# Altium PCB OLED.PcbDoc
Units mm, origin at the board's own origin, x right, y up, seen from the top; angles counter-clockwise.
Board outline 24.94 x 23.94 mm, 2 copper layers (Top Layer, Bottom Layer); 6 components, 5 nets, 14 pads, 24 vias.
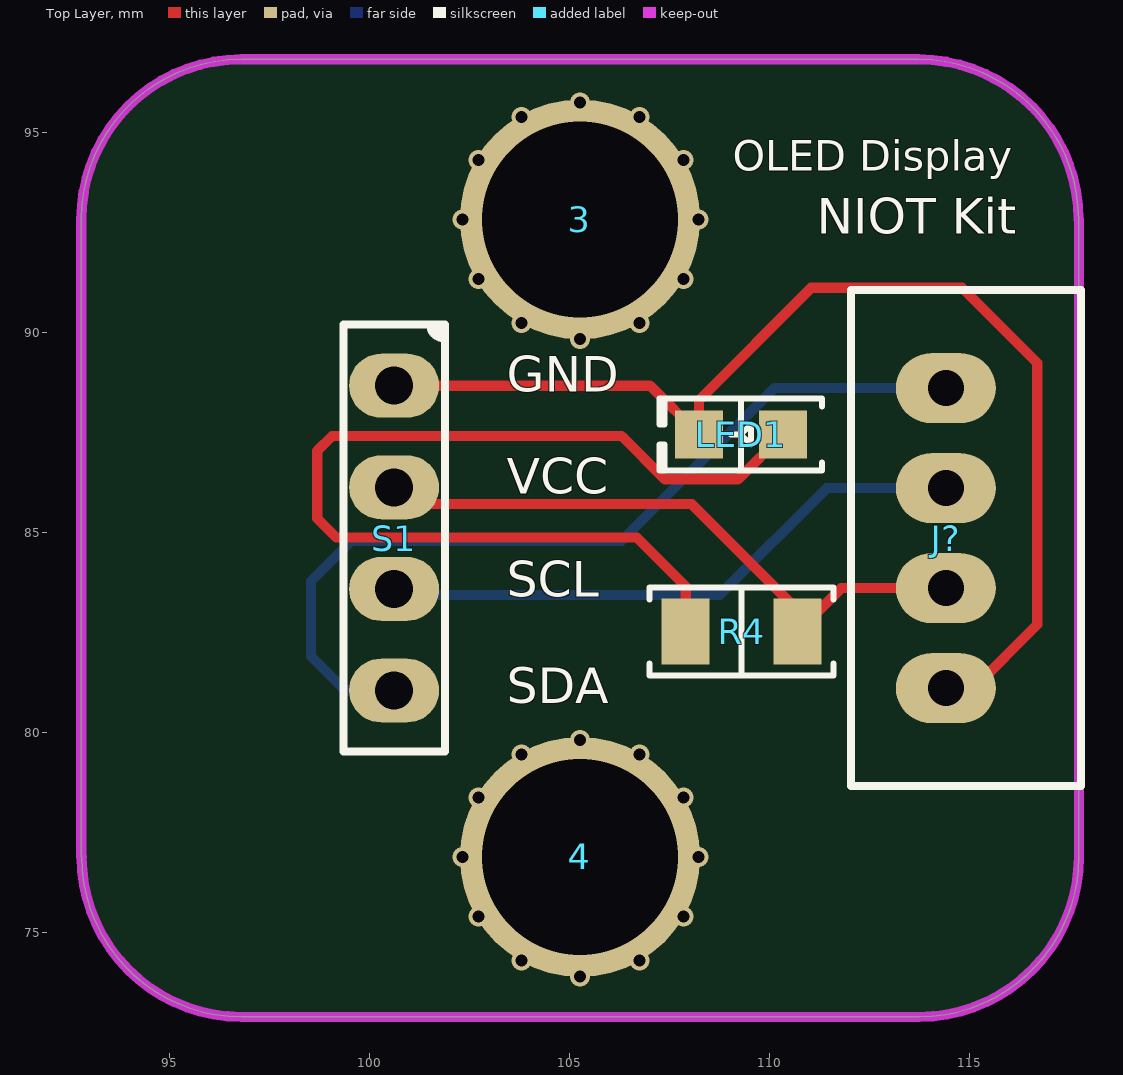
[diagram p0: Top Layer view]
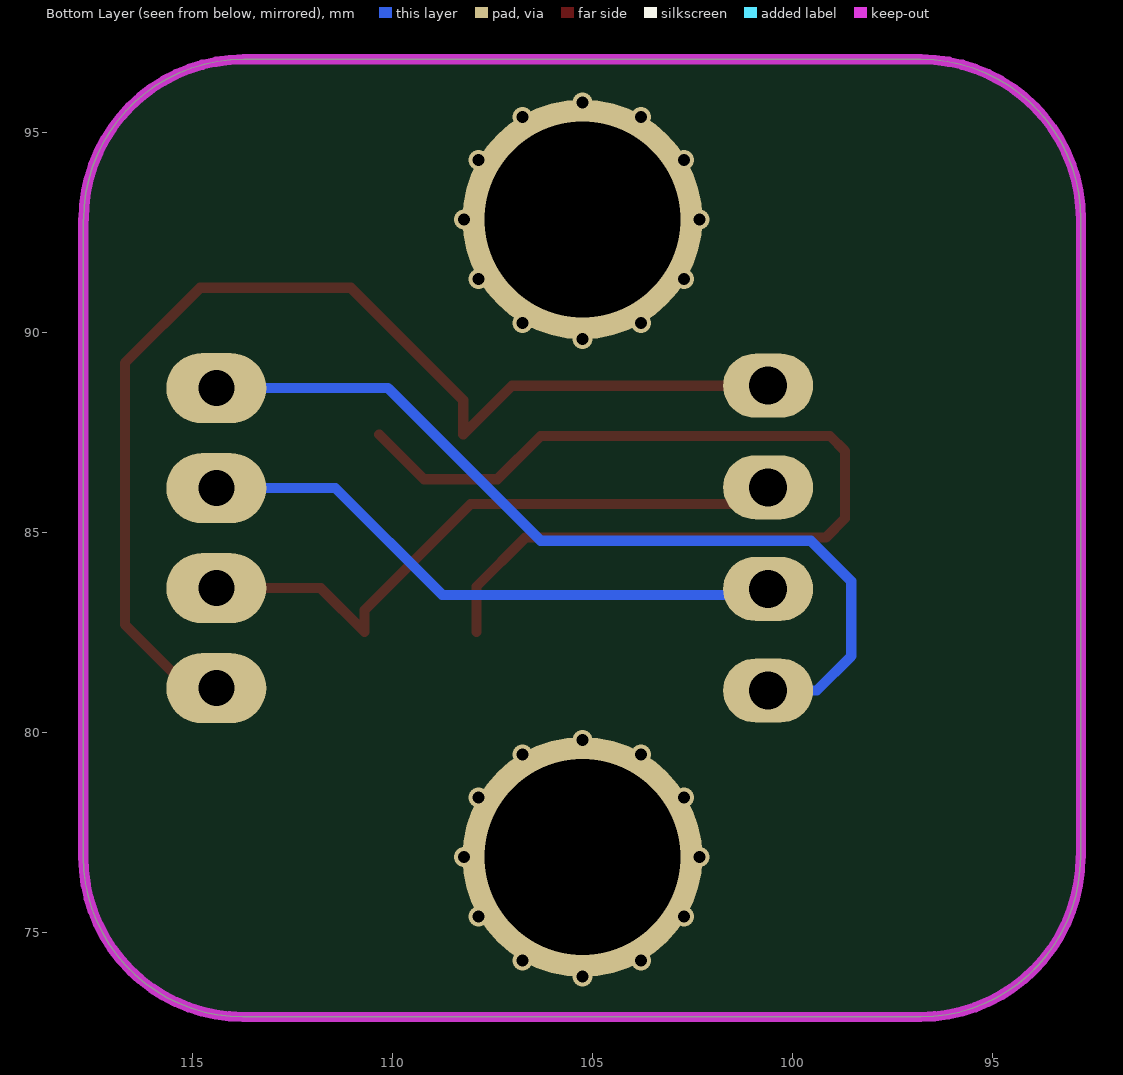
[diagram p1: Bottom Layer view, seen from below]

## Layer stack, top to bottom
Top Solder: solder mask 0.0102, Solder Resist, Dk 3.5
Top Layer: signal copper 0.0356
Dielectric 1: dielectric 0.32, FR-4, Dk 4.8
Bottom Layer: signal copper 0.0356
Bottom Solder: solder mask 0.0102, Solder Resist, Dk 3.5

## Board outline
92.79,76.88 92.79,92.82 cw(c96.79,92.82) 96.79,96.82 113.72,96.82 cw(c113.72,92.82) 117.72,92.82 117.729,92.82 117.729,76.88 cw(c113.729,76.88) 113.729,72.88 96.799,72.88 cw(c96.799,76.88)

## Design rules (kind name [scope] priority, off if disabled: settings)
Clearance [All] p1: gap=0.254 ignorepadtopadclearanceinfootprint=FALSE except(0: Arc-Hole Track-Hole SMDPad-Hole THPad-Hole Via-Hole Fill-Hole Poly-Hole Region-Hole Text-Hole)
PolygonConnect [All] p1: connectstyle=Relief reliefconductorwidth=0.254 reliefentries=4 polygonreliefangle="90 Angle" airgapwidth=0.254
RoomDefinition OLED [InComponentClass('OLED')] p1: confinementstyle=ConfineIn formatcopy=TRUE lockcomponents=FALSE outline 178.943,26.924 198.247,26.924 198.247,44.577 178.943,44.577
RoutingVias [All] p1: holewidth=0.711 width=1.27 viastyle="Through Hole" minholewidth=0.711 minwidth=1.27 maxholewidth=0.711 maxwidth=1.27
SolderMaskExpansion [All] p1: expansion=0.102
Width [All] p1: maxlimit=0.254 minlimit=0.254 preferedwidth=0.254
30 further rules are at their usual default settings.

## Classes and differential pairs
component class OLED: J? LED1 R4 S1

## Components (designator, comment, footprint, x,y, rotation, side; value= is the part's Value field where it differs from the comment)
3 "Lego" "Lego Hole" 105.255,92.82 r90 top
4 "Lego" "Lego Hole" 105.255,76.88 r90 top
J? "4 Pin" "JST XH B4B-XH-A - RIGHT" 114.404,84.85 r90 top
LED1 "RED" "LED 0805/2012 RED" 109.28,87.44 r180 top value=Green
R4 "1K" "RES 1206/3216" 109.3,82.51 r0 top
S1 "SSD1306 OLED Display 0.96" OLED 100.61,84.85 r270 top

## Footprints (in the part's own frame and the unit in brackets; to place one, negate y for a bottom-side part, rotate by r counter-clockwise, add the part's x,y. Pads: shape width x height; smd on the part's side, far side on the other; paste and mask are expansions set on the pad)
"JST XH B4B-XH-A - RIGHT" [mm]
  oval 1.75x2.5 hole 0.9: 1(-3.75,0) 2(-1.25,0) 3(1.25,0) 4(3.75,0)
  silkscreen extent -6.2,-3.38 6.2,2.38, body extent -6.2,-9.13 6.2,2.37, height 6.1
"LED 0805/2012 RED" [mm] "Chip Diode, 2-Leads, Body 2.00x1.25mm, IPC Medium Density"
  rect 1.2x1.2 smd: 1(-1.05,0) 2(1.05,0)
  silkscreen extent -2.03,-0.9 2.03,0.9, body extent -1,-0.62 1,0.63, height 0.9
"Lego Hole" [mm]
  round 6 hole 4.9: 0(0,0)
OLED [mm] "SSD1306 OLED Display 0.96"
  oval 1.6x2.25 hole 0.95: 1(-3.81,0) 2(-1.27,0) 3(1.27,0) 4(3.81,0)
  silkscreen extent -5.34,-1.27 5.34,1.27, body extent -13.35,-25.45 13.35,2.41, height 5.47
"RES 1206/3216" [mm] "Chip Resistor, 2-Leads, Body 3.13x1.55mm, IPC Medium Density"
  rect 1.2x1.65 smd: 1(-1.4,0) 2(1.4,0)
  silkscreen extent -2.3,-1.1 2.3,1.1, body extent -1.57,-0.8 1.62,0.8, height 0.6

## Part data
LED1: library part LED, "Chip LED"
R4: library part Resistor, "SMT Resistor"
S1: library part OLED

## Via types
v1: diameter 0.5, hole 0.3, Top Layer to Bottom Layer, 24 vias

## Nets (pads, with @x,y where several pads share a name; then routed paths per layer and width w, separated by ;. In a path a pad name is that pad's centre, name@x,y a point inside that pad or via, vN(x,y) a via of type N, cw(c..) or ccw(c..) an arc to the next point about the centre after c; other vN are vias at no path point)
GND: J?.1 LED1.2 S1.1 | length 28.9
  Top Layer w0.254: S1.1 107.01,88.66 LED1.2 108.23,88.3 111.04,91.11 114.808,91.11 116.69,89.228 116.69,82.69 115.1,81.1 J?.1
NetLED1_1: LED1.1 R4.1 | length 25.4
  Top Layer w0.254: R4.1 107.9,83.641 106.68,84.861 99.169,84.861 98.69,85.34 98.69,87.03 99.061,87.401 106.296,87.401 107.378,86.32 109.21,86.32 LED1.1
SCL: J?.3 S1.3 | length 15
  Bottom Layer w0.254: S1.3 100.76,83.43 108.754,83.43 111.424,86.1 J?.3
SDA: J?.4 S1.4 | length 22.2
  Bottom Layer w0.254: S1.4 99.39,81.04 98.53,81.9 98.53,83.773 99.543,84.785 106.294,84.785 110.109,88.6 J?.4
VCC: J?.2 R4.2 S1.2 | length 16.1
  Top Layer w0.254: S1.2 101.03,85.7 108.05,85.7 110.7,83.05 R4.2 111.79,83.6 J?.2
pads on no net: 3.0 4.0
copper on no net:
  other v1: 105.255,73.891 103.789,74.291 106.749,74.291 102.717,75.386 107.843,75.386 102.325,76.88 108.215,76.88 102.717,78.361 107.843,78.361 103.789,79.444 106.749,79.444 105.255,79.801 105.255,89.831 103.789,90.231 106.749,90.231 102.717,91.325 107.843,91.325 102.325,92.82 108.215,92.82 102.717,94.301 107.843,94.301 103.789,95.384 106.749,95.384 105.255,95.741

## Keep-outs
Keep-Out Layer:
  lines w0.254: 92.79,76.88 92.79,92.82 cw(c96.79,92.82) 96.79,96.82 113.72,96.82 cw(c113.72,92.82) 117.72,92.82 ; 92.799,76.88 ccw(c96.799,76.88) 96.799,72.88 113.729,72.88 ccw(c113.729,76.88) 117.729,76.88 117.729,92.82

## Silkscreen, mask and mechanical layers (free items; w line width, h text height)
Top Overlay:
  text "OLED Display" at 109.08,93.78 h1.3
  text "NIOT Kit" at 111.17,92.16 h1.52
  text "GND" at 103.421,88.21 h1.52
  text "VCC" at 103.423,85.66 h1.52
  text "SCL" at 103.421,83.08 h1.52
  text "SDA" at 103.421,80.42 h1.52
Top Solder:
  drawing of 381 lines, arcs and shapes, not listed
Bottom Solder:
  text "NIOMATIC INC © 2018" at 96.96,93.14 h1.8 r90